# EAGLE board SWARMESH (EAGLE 9.2.0)

Size 100 x 80 mm. Coordinates in mm from the lower left corner, seen from the top.
Outline: 0,0 100,0 100,80 0,80 0,0
Copper layers (1*16): Top 0.035mm / dielectric 1.5mm / Bottom 0.035mm
Design rules "default": minimum track width 6mil, minimum drill 0.35mm, track to track 6mil, track to pad 6mil, pad to pad 6mil, via to via 6mil, smd to smd 6mil, copper to edge 40mil, drill to drill 6mil, minimum pad ring 10mil, minimum via ring 8mil, stop-mask expansion 4mil, vias tented up to drill 0mil, thermal gap 10mil

## Footprints (pad centres in the part's own frame; a part is rotated, then mirrored left to right if it is on the bottom)
EB20D = drill 2.007 pad 4.597: + -5.08,0 | drill 2.007 pad 4.597 octagon: - 5.08,0
C050-024X044 = drill 0.813 octagon: 1 -2.54,0; 2 2.54,0
DIL16 = drill 0.813 long: 1 -8.89,-3.81; 2 -6.35,-3.81; 3 -3.81,-3.81; 4 -1.27,-3.81; 5 1.27,-3.81; 6 3.81,-3.81; 7 6.35,-3.81; 8 8.89,-3.81; 9 8.89,3.81; 10 6.35,3.81; 11 3.81,3.81; 12 1.27,3.81; 13 -1.27,3.81; 14 -3.81,3.81; 15 -6.35,3.81; 16 -8.89,3.81
1X03 = drill 1.016: 1 -2.54,0; 2 0,0; 3 2.54,0
JST-2-PTH-NS = drill 0.7 pad 1.6: 1 -1,0; 2 1,0
2X04 = drill 1.016 pad 1.676 octagon: 1 -3.81,-1.27; 2 -3.81,1.27; 3 -1.27,-1.27; 4 -1.27,1.27; 5 1.27,-1.27; 6 1.27,1.27; 7 3.81,-1.27; 8 3.81,1.27
1X10-BIG = drill 1.016 pad 1.778 octagon: 1 -11.43,0; 2 -8.89,0; 3 -6.35,0; 4 -3.81,0; 5 -1.27,0; 6 1.27,0; 7 3.81,0; 8 6.35,0; 9 8.89,0; 10 11.43,0
1X06 = drill 1.016 octagon: 1 -6.35,0; 2 -3.81,0; 3 -1.27,0; 4 1.27,0; 5 3.81,0; 6 6.35,0
LED3MM = drill 0.813 octagon: A -1.27,0; K 1.27,0
VIBE-MOTOR-10MM = drill 1.2 pad 2: + 13,-11; - 5,-11 | hole 2.25: 0,0; 18,0
TO220 = drill 1.118 long: 1 -2.54,-6.35; 2 0,-6.35; 3 2.54,-6.35 | hole 3.302: 0,11.176
PHOTOCELL = drill 0.8 pad 1.676: 1 -2,0; 2 2,0
0207/12 = drill 0.813 pad 1.676 octagon: 1 -6.35,0; 2 6.35,0
SWITCHE-DPDT = drill 0.7 pad 1.676: 1 -3.2,1.5; 2 0,1.5; 3 3.2,1.5; 4 -3.2,-1.5; 5 0,-1.5; 6 3.2,-1.5 | drill 1.5 pad 2.54: P$1 -6.1,3.2; P$2 -6,-3.2; P$3 6,-3.2; P$4 5.9,3.2
ESP32-DEVKITC = drill 1 pad 1.93: 1 -20.33,-12.69; 2 -17.79,-12.69; 3 -15.25,-12.69; 4 -12.71,-12.69; 5 -10.17,-12.69; 6 -7.63,-12.69; 7 -5.09,-12.69; 8 -2.55,-12.69; 9 -0.01,-12.69; 10 2.53,-12.69; 11 5.07,-12.69; 12 7.61,-12.69; 13 10.15,-12.69; 14 12.69,-12.69; 15 15.23,-12.69; 16 17.77,-12.69; 17 20.31,-12.69; 18 22.85,-12.69; 19 25.39,-12.69; 20 25.39,12.5; 21 22.85,12.5; 22 20.31,12.5; 23 17.77,12.5; 24 15.23,12.5; 25 12.69,12.5; 26 10.15,12.5; 27 7.61,12.5; 28 5.07,12.5; 29 2.53,12.5; 30 -0.01,12.5; 31 -2.55,12.5; 32 -5.09,12.5; 33 -7.63,12.5; 34 -10.17,12.5; 35 -12.71,12.5; 36 -15.25,12.5; 37 -17.79,12.5; 38 -20.33,12.5
TO220H = drill 1.118 long: 1 -2.54,-10.16; 2 0,-10.16; 3 2.54,-10.16 | hole 3.302: 0,4.826
4 = drill 0.61 pad 1.27: A -1.27,1.27; C 1.27,-1.27; E 1.27,1.27; K -1.27,-1.27
PNA460XM = drill 1.016 pad 1.93 square: 1 -2.54,0 | drill 1.016 pad 1.93: 2 0,0; 3 2.54,0
1X04-BIG = drill 1.016 pad 1.778: 1 0,0; 2 2.54,0; 3 5.08,0; 4 7.62,0

## Placement (x,y rotation side)
C1  10uF  [EB20D]  -60.96,43.18 0 top  (outside the outline)
C2  0.1uF  [C050-024X044]  -49.53,83.82 0 top  (outside the outline)
C3  0.1uF  [C050-024X044]  -57.15,83.82 0 top  (outside the outline)
IC1  4051N  [DIL16]  -31.75,64.77 0 top  (outside the outline)
J1  [1X03]  -17.78,88.9 0 top  (outside the outline)
J2  [1X03]  -26.67,88.9 0 top  (outside the outline)
J3  [1X03]  -35.56,88.9 0 top  (outside the outline)
J4  [1X03]  -44.45,88.9 0 top  (outside the outline)
JBAT  [JST-2-PTH-NS]  -91.44,60.96 0 top  (outside the outline)
JCHG  [JST-2-PTH-NS]  -16.51,73.66 0 top  (outside the outline)
JI2C  [2X04]  -25.4,73.66 0 top  (outside the outline)
JIMU  PINHD-1X10  [1X10-BIG]  -44.45,74.93 0 top  (outside the outline)
JM1  [1X06]  -68.58,81.28 0 top  (outside the outline)
JM2  [1X06]  -85.09,81.28 0 top  (outside the outline)
JNPX  [1X03]  -53.34,88.9 0 top  (outside the outline)
LED1  TLLG4400  [LED3MM]  -39.37,105.41 0 top  (outside the outline)
LED2  TLLR4400  [LED3MM]  -53.34,105.41 0 top  (outside the outline)
LED3  TLLY4400  [LED3MM]  -67.31,105.41 0 top  (outside the outline)
M1  MOTOR10MM  [VIBE-MOTOR-10MM]  -83.82,12.7 0 top  (outside the outline)
M2  MOTOR10MM  [VIBE-MOTOR-10MM]  -34.29,44.45 0 top  (outside the outline)
Q1  TIP122  [TO220]  -43.18,40.64 0 top  (outside the outline)
R1  PHOTOCELLPTH  [PHOTOCELL]  -21.59,83.82 0 top  (outside the outline)
R2  1k  [0207/12]  -66.04,88.9 0 top  (outside the outline)
R3  PHOTOCELLPTH  [PHOTOCELL]  -33.02,83.82 0 top  (outside the outline)
R4  1k  [0207/12]  -81.28,88.9 0 top  (outside the outline)
R5  1k  [0207/12]  -20.32,93.98 0 top  (outside the outline)
R6  1k  [0207/12]  -35.56,93.98 0 top  (outside the outline)
R7  1k  [0207/12]  -50.8,93.98 0 top  (outside the outline)
R8  100  [0207/12]  -66.04,93.98 0 top  (outside the outline)
R9  10k  [0207/12]  -81.28,93.98 0 top  (outside the outline)
R10  1k  [0207/12]  -20.32,99.06 0 top  (outside the outline)
R11  100  [0207/12]  -35.56,99.06 0 top  (outside the outline)
R12  10k  [0207/12]  -50.8,99.06 0 top  (outside the outline)
R13  1k  [0207/12]  -66.04,99.06 0 top  (outside the outline)
R14  10k  [0207/12]  -81.28,99.06 0 top  (outside the outline)
R15  47k  [0207/12]  -20.32,104.14 0 top  (outside the outline)
S1  [SWITCHE-DPDT]  -76.2,63.5 0 top  (outside the outline)
U1  ESP32DEVKITC  [ESP32-DEVKITC]  -40.64,16.51 0 top  (outside the outline)
U3  L293D  [DIL16]  -54.61,64.77 0 top  (outside the outline)
U4  7805T  [TO220H]  -80.01,44.45 0 top  (outside the outline)
U$1  CNY70  [4]  -93.98,38.1 0 top  (outside the outline)
U$2  CNY70  [4]  -17.78,64.77 0 top  (outside the outline)
U$3  PNA460XM  [PNA460XM]  -40.64,83.82 0 top  (outside the outline)
U$4  PINHD-1X10  [1X10-BIG]  -71.12,74.93 0 top  (outside the outline)
ULTRA1  1X4-BIG  [1X04-BIG]  -93.98,74.93 0 top  (outside the outline)

## Library data of the parts
C1-C3 J1-J4 JI2C JIMU JM1 JM2 JNPX R2 R4-R15 U4 U$3 U$4 ULTRA1 = adafruit
IC1 = 40xx
JBAT JCHG = SparkFun-Connectors
LED1 = led; MF: VISHAY SEMICONDUCTOR; OC_FARNELL: 1612435
LED2 = led; MF: VISHAY SEMICONDUCTOR; OC_FARNELL: 1612437
LED3 = led; MF: VISHAY SEMICONDUCTOR; OC_FARNELL: 1612439
M1 M2 S1 = SparkFun-Electromechanical
Q1 = transistor-npn
R1 R3 = SparkFun-Sensors
U1 = ESP32-DEVKITC (1)
U3 = st-microelectronics; MPN: L293D; OC_FARNELL: 9589619; OC_NEWARK: 56P8249
U$1 U$2 = cny70

## Nets
GND: C1.- C2.2 IC1.8 J1.3 J2.3 J3.3 J4.3 JBAT.2 JCHG.2 LED1.K LED2.K LED3.K R1.2 R3.2 R14.1 U1.32 U1.38 U3.4 U3.5 U3.12 U3.13 U4.2 U$1.E U$1.K U$2.E U$2.K U$3.2 ULTRA1.4
N$1: LED1.A R4.1
N$2: LED2.A R5.1
N$3: LED3.A R6.1
N$4: U3.2
N$5: U3.7
N$6: U3.15
N$7: U3.10
N$8: U3.1
N$9: U3.9
N$10: M1.+ U3.3
N$11: M1.- U3.6
N$12: M2.- U3.14
N$13: M2.+ U3.11
N$14: R4.2
N$15: R5.2
N$16: R6.2
N$18: R7.2 U$1.C
N$19: R11.1 U$2.A
N$20: U$3.1
N$21: JCHG.1 S1.2
N$22: R8.1 U$1.A
N$23: J1.1
N$24: R1.1 R9.2
N$26: R10.2 U$2.C
N$27: ULTRA1.2
N$28: ULTRA1.3
N$29: J2.1
N$30: J3.1
N$31: J4.1
N$32: R14.2 R15.1
N$35: R3.1 R12.2
N$37: Q1.2 R2.1
N$38: R15.2
V+: C1.+ JBAT.1 S1.3 U3.8 U4.1
VCC: C2.1 IC1.16 J1.2 J2.2 J3.2 J4.2 R7.1 R8.2 R9.1 R10.1 R11.2 R12.1 U1.19 U3.16 U4.3 U$3.3 ULTRA1.1
VEE: IC1.7

## Tracks (layer width: path | path; a pad name or v marks a point on that pad's centre or on a via)
GND  (27 unrouted)
N$1  (1 unrouted)
N$2  (1 unrouted)
N$3  (1 unrouted)
N$10  (1 unrouted)
N$11  (1 unrouted)
N$12  (1 unrouted)
N$13  (1 unrouted)
N$18  (1 unrouted)
N$19  (1 unrouted)
N$21  (1 unrouted)
N$22  (1 unrouted)
N$24  (1 unrouted)
N$26  (1 unrouted)
N$32  (1 unrouted)
N$35  (1 unrouted)
N$37  (1 unrouted)
V+  (4 unrouted)
VCC  (16 unrouted)